# Altium PCB Pcb1.PcbDoc
Units mm, origin at the board's own origin, x right, y up, seen from the top; angles counter-clockwise.
Board outline 25.9 x 25.9 mm, 2 copper layers (Top Layer, Bottom Layer), stack 1.569 mm thick; 3 components, 3 nets, 6 pads, 0 vias.
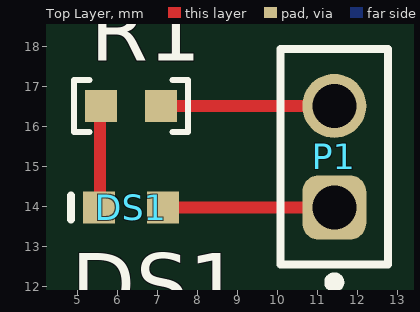
[diagram p0: Top Layer view]
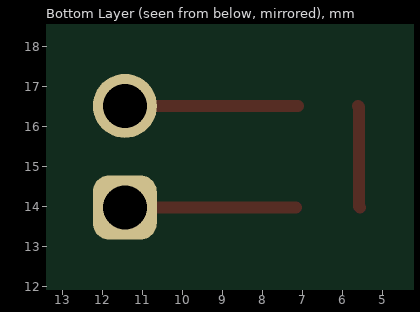
[diagram p1: Bottom Layer view, seen from below]
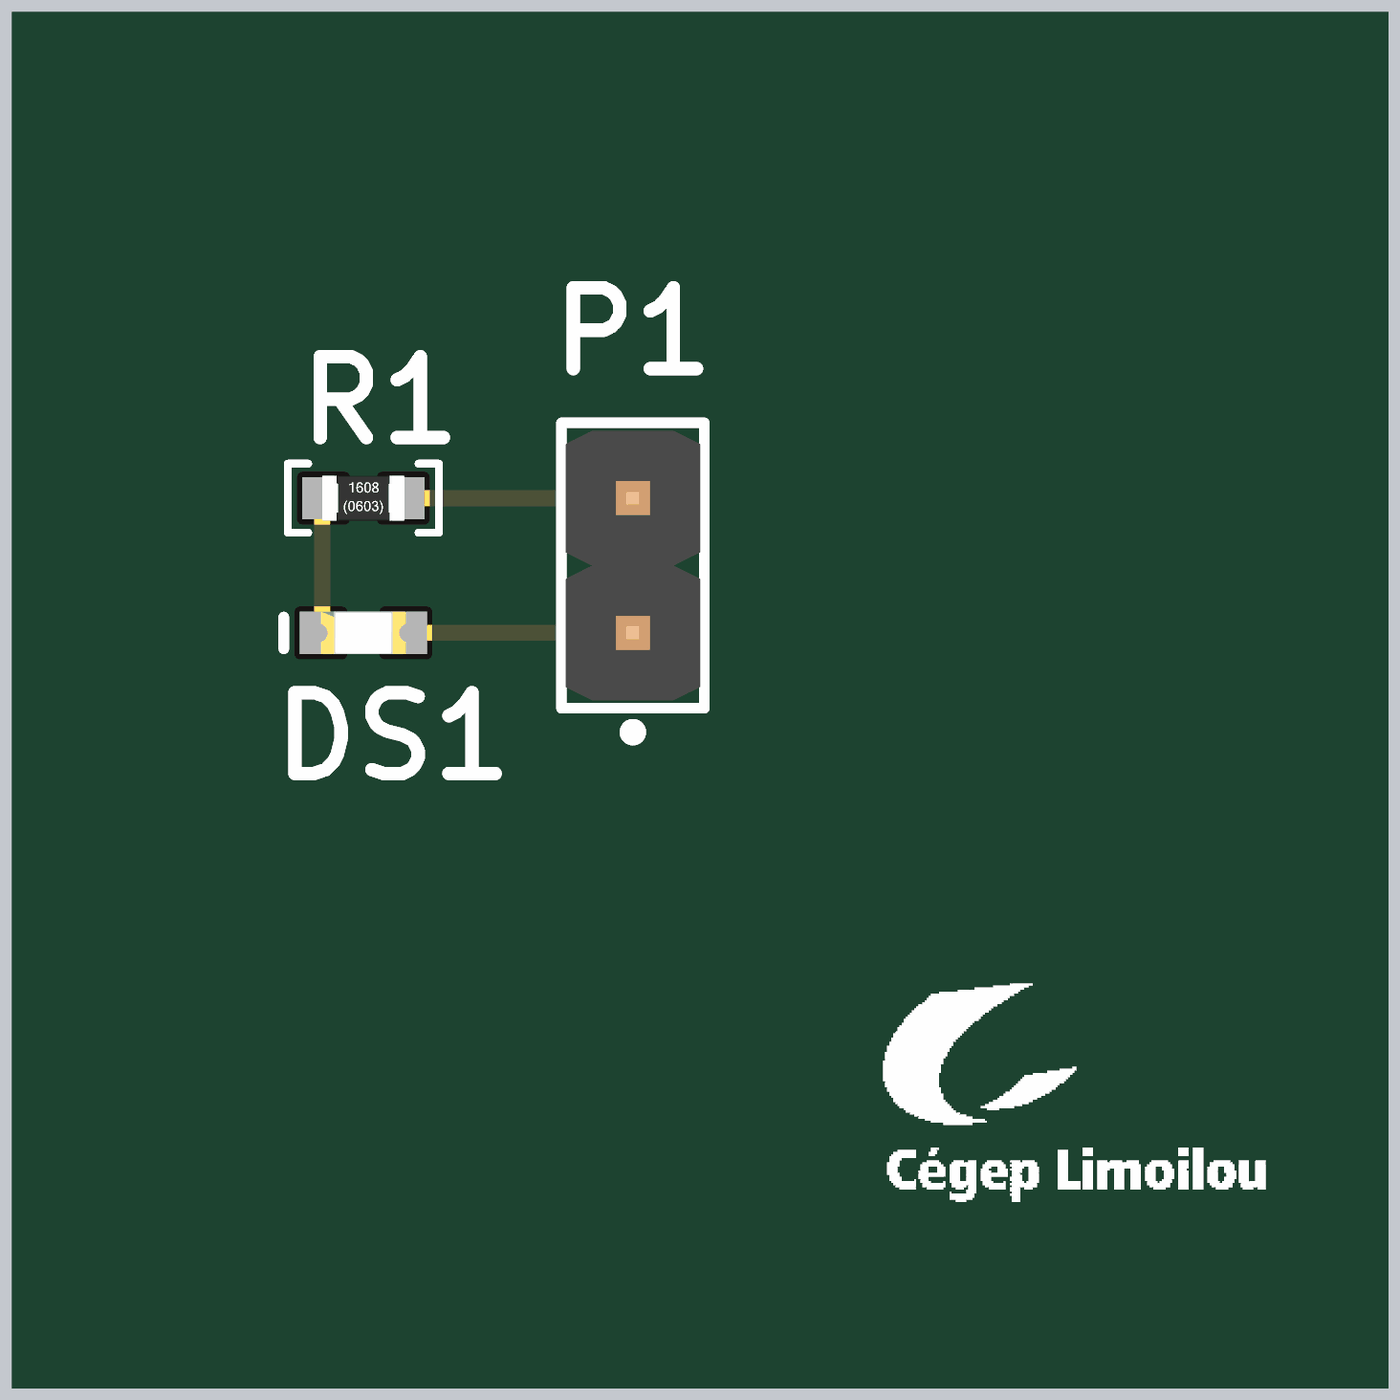
[diagram p2: 3D render of the assembled board from above, using the file's embedded part models]

## Layer stack, top to bottom
Top Solder: solder mask 0.0254, SM-001, Dk 4
Top Layer: signal copper 0.035
Dielectric 1: core 1.4986, Core-043, Dk 4.3
Bottom Layer: signal copper 0.035
Bottom Solder: solder mask 0.0254, SM-001, Dk 4

## Board outline
-0.25,0 -0.25,23.112 -0.25,23.288 -0.25,23.463 cw(c1.707,23.463) 0.323,24.847 cw(c2.262,22.908) 2.262,25.65 2.286,25.65 23.114,25.65 cw(c23.114,23.094) 24.922,24.902 cw(c23.163,23.143) 25.65,23.144 25.65,23.143 25.65,0 cw(c25.4,0) 25.4,-0.25 0,-0.25 cw(c0,0)

## Design rules (kind name [scope] priority, off if disabled: settings)
BoardOutlineClearance [All] p1: gap=0.2 ignorepadtopadclearanceinfootprint=FALSE
Clearance [All] p1: gap=0.15 ignorepadtopadclearanceinfootprint=FALSE
DiffPairsRouting [All] p1: maxlimit=0.125 minlimit=0.125 mostfreqgap=0.125 toplayer_minwidth=0.125 toplayer_maxwidth=0.125 toplayer_prefwidth=0.125 bottomlayer_minwidth=0.125 bottomlayer_maxwidth=0.125 bottomlayer_prefwidth=0.125 maxuncoupledlength=15
HoleSize [All] p1: absolutevalues=TRUE maxlimit=5 minlimit=0.2 maxpercent=80.000 minpercent=20.000
HoleToHoleClearance [All] p1: gap=0.3 allowstackedmicrovias=TRUE
MinimumSolderMaskSliver [All] p1: minsoldermaskwidth=0.075
PlaneClearance [All] p1: clearance=0.5
PlaneConnect [All] p1: pad.planeconnectstyle=Relief pad.reliefexpansion=0.508 pad.reliefentries=4 pad.reliefconductorwidth=0.254 pad.reliefairgap=0.254 via.planeconnectstyle=Direct via.reliefexpansion=0.508 via.reliefentries=4 via.reliefconductorwidth=0.254 via.reliefairgap=0.254
PolygonConnect [All] p1: thpad.connectstyle=Relief thpad.reliefconductorwidth=0.3 thpad.reliefentries=4 thpad.polygonreliefangle="90 Angle" thpad.airgapwidth=0.2 smdpad.connectstyle=Relief smdpad.reliefconductorwidth=0.3 smdpad.reliefentries=4 smdpad.polygonreliefangle="90 Angle" smdpad.airgapwidth=0.2 via.connectstyle=Direct via.reliefconductorwidth=0.254 via.reliefentries=4 via.polygonreliefangle="90 Angle" via.airgapwidth=0.254
RoutingVias [All] p1: holewidth=0.5 width=0.8 viastyle="Through Hole" minholewidth=0.3 minwidth=0.6 maxholewidth=0.7 maxwidth=1.2
SilkToSilkClearance [All] p1: silktosilkclearance=0
SilkToSolderMaskClearance [IsPad] p1: minsilkscreentomaskgap=0 clearancetoexposedcopper=TRUE
SolderMaskExpansion [All] p1: expansion=0.1 istentingtop=FALSE
Width [All] p1: maxlimit=5 minlimit=0.15 preferedwidth=0.2
22 further rules are at their usual default settings.

## Components (designator, comment, footprint, x,y, rotation, side; value= is the part's Value field where it differs from the comment)
DS1 "XL-1608UOC-06" D_LED_0603 6.35,13.97 r0 top value=Orange
P1 "61300211121" CONN_HDR_2POS_100MILS_TH 11.43,15.24 r90 top
R1 "Res 1k 1% 0603" R_1608[0603] 6.35,16.51 r0 top value=1k

## Footprints (in the part's own frame and the unit in brackets; to place one, negate y for a bottom-side part, rotate by r counter-clockwise, add the part's x,y. Pads: shape width x height; smd on the part's side, far side on the other; paste and mask are expansions set on the pad)
CONN_HDR_2POS_100MILS_TH [mm] "Pin Header, pitch 2.54 mm, THT, Vertical, single row, 2p"
  rrect50% 1.6x1.6 hole 1.1: 1(-1.27,0)
  round 1.6 hole 1.1: 2(1.27,0)
  silkscreen extent -3.26,-1.35 2.69,1.35, body extent -2.54,-1.27 2.54,1.27, height 8.57
D_LED_0603 [mm] "Chip LED, 2-Leads, Body 1.6x0.8mm, IPC Medium Density"
  rect 0.8x0.8 smd: 1(-0.8,0) 2(0.8,0)
  silkscreen extent -1.5,-0.3 -1.5,0.3, body extent -0.8,-0.4 0.8,0.4, height 0.7
R_1608[0603] [mm] "Chip Resistor; Body 1.6 x 0.8 mm (LxW typ)"
  rect 0.8x0.8 smd: 1(-0.75,0) 2(0.75,0)
  silkscreen extent -1.43,-0.65 1.43,0.65, body extent -0.77,-0.42 0.78,0.43, height 0.45

## Part data
DS1: library part D_LED_ORANGE_0603, "LED Orange Clear", Manufacturer 1=XINGLIGHT, Manufacturer 2=Wurth, Manufacturer Part Number 2=150060AS75000, Supplier Part Number 1=C965800, Code CEGEP=KLEDOC0603, Manufacturer Part Number 1=XL-1608UOC-06, Mounting Technology=SMT, Supplier 1=LCSC, Supplier 2=Digikey, Supplier Part Number 2=732-150060AS75000CT-ND
P1: library part CONN-100MIL-HDR-01X02, "CONN HEADER 2POS 100MIL", Manufacturer 1=Megastar, Manufacturer 2="Würth Elektronik", Manufacturer Part Number 1=ZX-PZ2.54-1-2PZZ, Supplier Part Number 1=C7501260, Manufacturer Part Number 2=61300211121, Mounting Technology=TH, Supplier 1=LCSC
R1: library part RES015, "Resistor type 1", Manufacturer 1=Yageo, Manufacturer Part Number 1=RC0603FR-071KL, Max Working Voltage=75V, Supplier Part Number 1=C22548, Tolerance=1%, LibRef=RES015, Mounting Technology=SMT, Puissance=1/10W, Supplier 1=LCSC

## Nets (pads, with @x,y where several pads share a name; then routed paths per layer and width w, separated by ;. In a path a pad name is that pad's centre, name@x,y a point inside that pad or via, vN(x,y) a via of type N, cw(c..) or ccw(c..) an arc to the next point about the centre after c; other vN are vias at no path point)
NetDS1_1: DS1.1 R1.1 | length 2.6
  Top Layer w0.3: DS1.1 5.575,13.995 5.575,16.485 R1.1
NetDS1_2: DS1.2 P1.1 | length 4.3
  Top Layer w0.3: DS1.2 P1.1
NetP1_2: P1.2 R1.2 | length 4.3
  Top Layer w0.3: R1.2 P1.2

## Silkscreen, mask and mechanical layers (free items; w line width, h text height)
Top Overlay:
  drawing of 18 lines, arcs and shapes, not listed
  text ".NomDeProjet" at 1.741,7.367 h1.5
  text ".Revision" at 1.741,6.1 h1.5
  text ".Print_Date" at 1.739,4.102 h1.5
  text ".NomDeLetudiant" at 1.5,3.015 h1.5
Board:
  lines w0.5: 0,23.114 0,23.463 cw(c1.707,23.463) 0.5,24.67 cw(c2.262,22.908) 2.262,25.4 ; 0,23.288 0,0 25.4,0 25.4,23.143 ccw(c23.163,23.143) 24.745,24.725 ccw(c23.114,23.094) 23.114,25.4 2.286,25.4
Drill Drawing:
  lines w0.25: 111.494,79.857 117.77,79.857 133.779,79.857 142.736,79.857 149.858,79.857 ; 111.494,82.857 117.77,82.857 133.779,82.857 142.736,82.857 149.858,82.857 ; 111.494,85.857 117.77,85.857 133.779,85.857 142.736,85.857 149.858,85.857 ; 111.494,88.857 117.77,88.857 133.779,88.857 142.736,88.857 149.858,88.857 ; 111.494,91.857 117.77,91.857 133.779,91.857 142.736,91.857 149.858,91.857 ; 111.494,94.857 117.77,94.857 133.779,94.857 142.736,94.857 149.858,94.857 ; 111.494,97.857 117.77,97.857 133.779,97.857 142.736,97.857 149.858,97.857 ; 111.494,100.857 117.77,100.857 133.779,100.857 142.736,100.857 149.858,100.857 ; 111.494,103.857 149.858,103.857 ; 111.887,62.942 200.071,62.942 ; 111.887,66.045 200.071,66.045 ; 117.77,106.857 117.77,76.857 ; 119.869,59.839 119.869,69.148 ; 125.936,59.839 125.936,69.148 ; 133.779,106.857 133.779,76.857 ; 139.535,59.839 139.535,69.148 ; 142.736,106.857 142.736,76.857 ; 145.724,59.839 145.724,69.148 ; 154.736,59.839 154.736,69.148 ; 171.797,59.839 171.797,69.148 ; 179.181,59.839 179.181,69.148 ; 188.827,59.839 188.827,69.148 ; 117.77,76.857 133.779,76.857 ; 117.77,76.857 111.494,76.857 111.494,106.857 149.858,106.857 149.858,76.857 142.736,76.857 ; 133.779,76.857 142.736,76.857 ; 111.887,59.839 200.071,59.839 200.071,69.148 111.887,69.148 111.887,59.839
  lines w0.254: 113.139,63.873 114.518,63.873 114.518,65.252 113.139,65.252 113.139,63.873
  text "Layer" at 112.994,104.607 h1.5
  text "Name" at 119.27,104.607 h1.5
  text "Thickness" at 135.279,104.607 h1.5
  text "Gerber" at 144.236,104.607 h1.5
  text "Top Overlay" at 119.27,101.607 h1.5
  text "GTO" at 144.236,101.607 h1.5
  text "Top Solder" at 119.27,98.607 h1.5
  text "0.025mm" at 135.279,98.607 h1.5
  text "GTS" at 144.236,98.607 h1.5
  text "Top Surface Finish" at 119.27,95.607 h1.5
  text "0.020mm" at 135.279,95.607 h1.5
  text "1" at 112.994,92.607 h1.5
  text "Top Layer" at 119.27,92.607 h1.5
  text "0.035mm" at 135.279,92.607 h1.5
  text "GTL" at 144.236,92.607 h1.5
  text "Dielectric 1" at 119.27,89.607 h1.5
  text "1.499mm" at 135.279,89.607 h1.5
  text "2" at 112.993,86.607 h1.5
  text "Bottom Layer" at 119.27,86.607 h1.5
  text "0.035mm" at 135.279,86.607 h1.5
  text "GBL" at 144.236,86.607 h1.5
  text "Bottom Surface Finish" at 119.27,83.607 h1.5
  text "0.020mm" at 135.279,83.607 h1.5
  text "Bottom Solder" at 119.27,80.607 h1.5
  text "0.025mm" at 135.279,80.607 h1.5
  text "GBS" at 144.236,80.607 h1.5
  text "Bottom Overlay" at 119.27,77.607 h1.5
  text "GBO" at 144.236,77.607 h1.5
  text "Total board thickness:" at 112.994,74.607 h1.5
  text "1.659mm" at 135.279,74.607 h1.5
  text "Symbol" at 113.749,66.976 h1.8
  text "Count" at 120.8,66.976 h1.8
  text "Hole Size" at 126.867,66.976 h1.8
  text "Plated" at 140.466,66.976 h1.8
  text "Hole Type" at 146.655,66.976 h1.8
  text "Drill Layer Pair" at 155.666,66.976 h1.8
  text "Via/Pad" at 172.728,66.976 h1.8
  text "Pad Shape" at 180.112,66.976 h1.8
  text "Hole Length" at 189.758,66.976 h1.8
  text "2" at 120.8,63.873 h1.5
  text "1.100mm (43.31mil)" at 126.867,63.873 h1.5
  text "PTH" at 140.466,63.873 h1.5
  text "Round" at 146.655,63.873 h1.5
  text "Top Layer - Bottom Layer" at 155.666,63.873 h1.5
  text "Pad" at 172.728,63.873 h1.5
  text "(Mixed)" at 180.112,63.873 h1.5
  text "-" at 189.758,63.873 h1.5
  text "2 Total" at 120.8,60.77 h1.5

## Dimensions
0,23.288 to 25.4,0 on Drill Drawing
0,0 to 2.286,25.4 on Drill Drawing